# EAGLE board microSRCP-RaspiV2 (EAGLE 6.5.0)
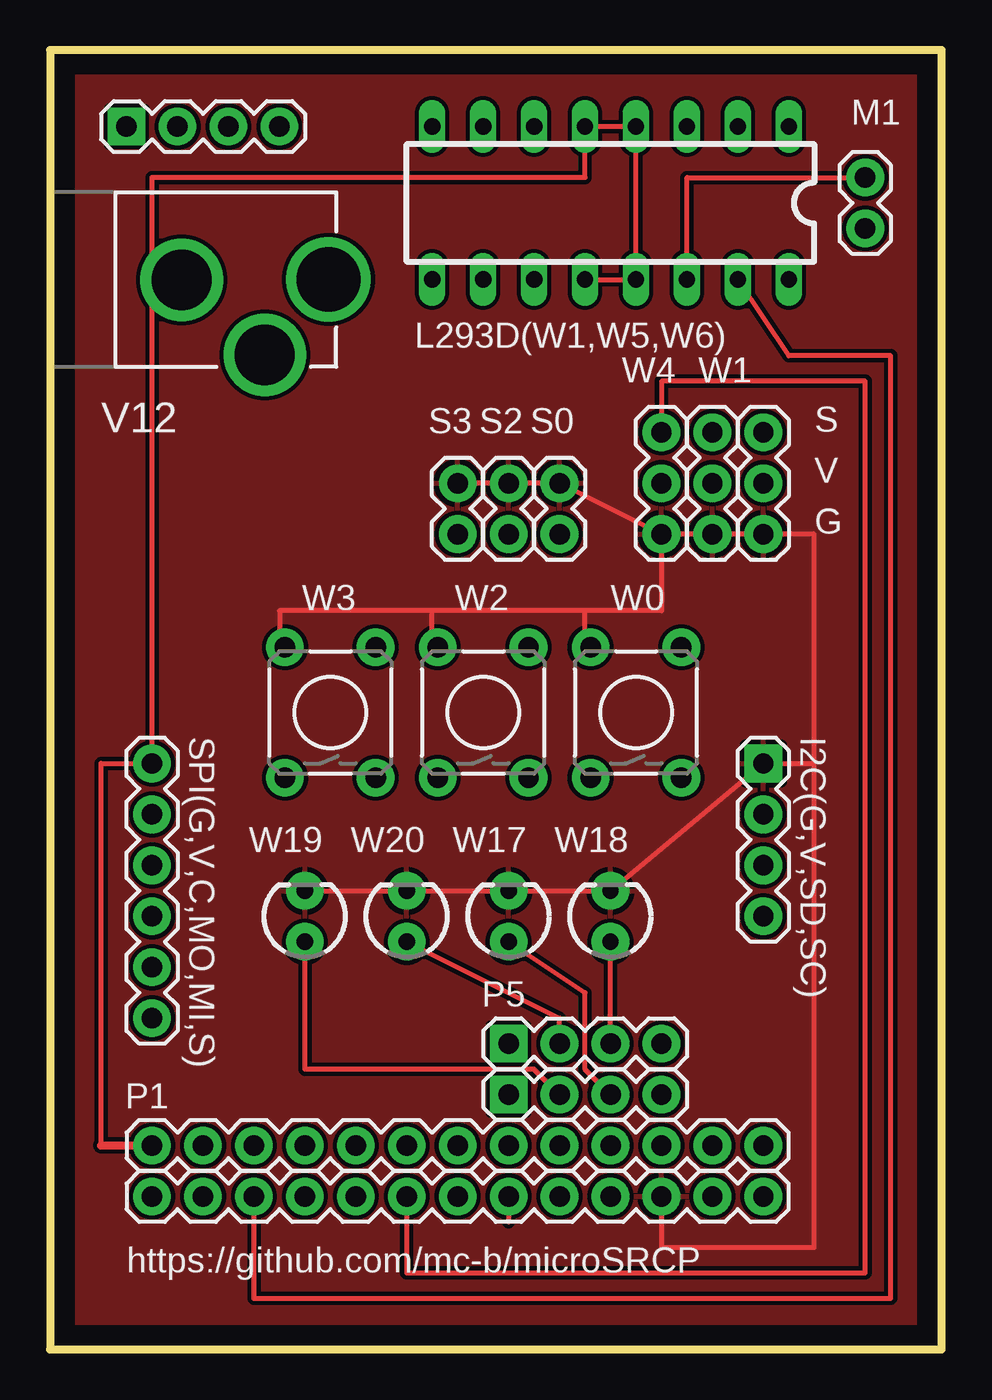
[diagram p0: board, top side]
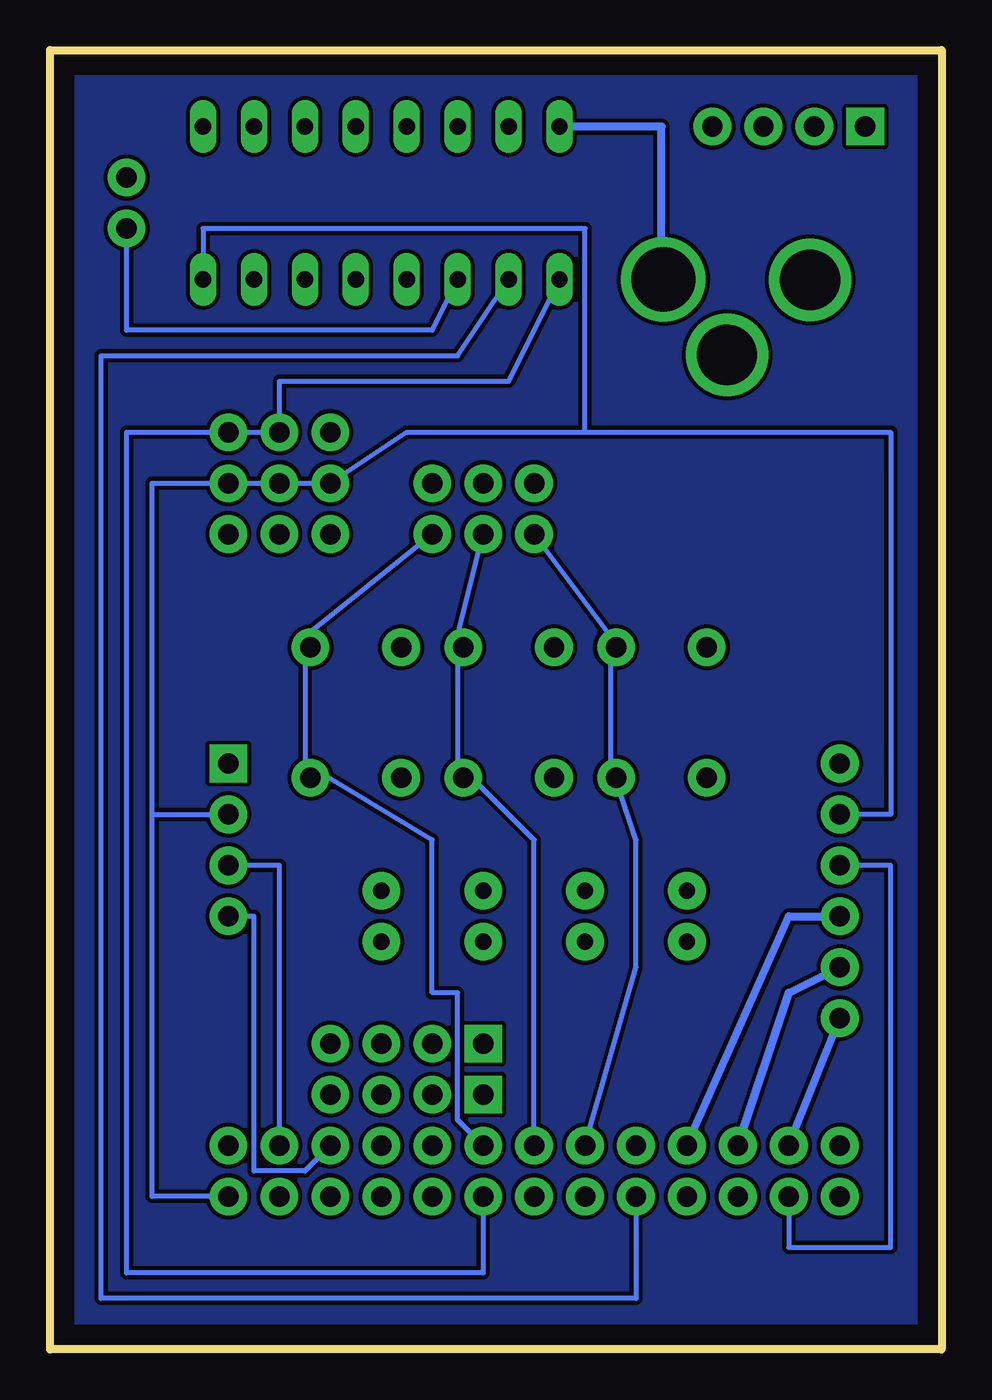
[diagram p1: board, bottom side, seen from below]

Size 44.45 x 64.77 mm. Coordinates in mm from the lower left corner, seen from the top.
Outline: 0,0 44.45,0 44.45,64.77 0,64.77 0,0
Copper layers (1*16): Top 0.035mm / dielectric 1.5mm / Bottom 0.035mm
Design rules "default": minimum track width 10mil, minimum drill 24mil, track to track 8mil, track to pad 8mil, pad to pad 8mil, via to via 8mil, smd to smd 8mil, copper to edge 40mil, drill to drill 8mil, minimum pad ring 10mil, minimum via ring 8mil, stop-mask expansion 4mil, vias tented up to drill 0mil, thermal gap 10mil

## Footprints (pad centres in the part's own frame; a part is rotated, then mirrored left to right if it is on the bottom)
1X13 = drill 1.016 pad 1.88: 1 0,0; 2 2.54,0; 3 5.08,0; 4 7.62,0; 5 10.16,0; 6 12.7,0; 7 15.24,0; 8 17.78,0; 9 20.32,0; 10 22.86,0; 11 25.4,0; 12 27.94,0; 13 30.48,0
1X04 = drill 1.016 pad 1.88 square: 1 0,0 | drill 1.016 pad 1.88: 2 2.54,0; 3 5.08,0; 4 7.62,0
DIL16 = drill 0.813 long: 1 -8.89,-3.81; 2 -6.35,-3.81; 3 -3.81,-3.81; 4 -1.27,-3.81; 5 1.27,-3.81; 6 3.81,-3.81; 7 6.35,-3.81; 8 8.89,-3.81; 9 8.89,3.81; 10 6.35,3.81; 11 3.81,3.81; 12 1.27,3.81; 13 -1.27,3.81; 14 -3.81,3.81; 15 -6.35,3.81; 16 -8.89,3.81
1X02 = drill 1.016 pad 1.88: 1 0,0; 2 2.54,0
1X06 = drill 1.016 pad 1.88: 1 0,0; 2 2.54,0; 3 5.08,0; 4 7.62,0; 5 10.16,0; 6 12.7,0
POWER_JACK_PTH_LOCK = drill 2.997 pad 4.115: GND 0.025,6.557; GNDBREAK 3.762,10.7 | drill 3.2 pad 4.115: PWR 0,13.878
TACTILE-PTH = drill 1.016 pad 1.88: 1 -3.251,2.261; 2 3.251,2.261; 3 -3.251,-2.261; 4 3.251,-2.261
1X03 = drill 1.016 pad 1.88: 1 0,0; 2 2.54,0; 3 5.08,0
LED3MM = drill 0.813 pad 1.88: A -1.27,0; K 1.27,0

## Placement (x,y rotation side)
E$1  [1X13]  5.08,7.62 0 top
E$2  [1X04]  3.81,60.96 0 top
E$3  [1X04]  22.86,12.7 0 top
I2C(G,V,SD,SC)  [1X04]  35.56,29.21 270 top
L293D(W1,W5,W6)  [DIL16]  27.94,57.15 180 top
M1  [1X02]  40.64,58.42 270 top
P1  [1X13]  5.08,10.16 0 top
P5  [1X04]  22.86,15.24 0 top
S0  [1X02]  25.4,40.64 90 top
S2  [1X02]  22.86,40.64 90 top
S3  [1X02]  20.32,40.64 90 top
SPI(G,V,C,MO,MI,S)  [1X06]  5.08,29.21 270 top
V12  [POWER_JACK_PTH_LOCK]  0,53.34 270 top
W0  [TACTILE-PTH]  29.21,31.75 90 top
W1  [1X03]  33.02,40.64 90 top
W1N  [1X03]  35.56,40.64 90 top
W2  [TACTILE-PTH]  21.59,31.75 90 top
W3  [TACTILE-PTH]  13.97,31.75 90 top
W4  [1X03]  30.48,40.64 90 top
W17  [LED3MM]  22.86,21.59 90 top
W18  [LED3MM]  27.94,21.59 90 top
W19  [LED3MM]  12.7,21.59 90 top
W20  [LED3MM]  17.78,21.59 90 top

## Library data of the parts
E$1-E$3 I2C(G,V,SD,SC) P1 P5 V12 = SparkFun-Connectors
L293D(W1,W5,W6) = SparkFun-DigitalIC
M1 S0 S2 S3 W1 W4 = SparkFun-Capacitors
SPI(G,V,C,MO,MI,S) = SparkFun-Boards
W0 W2 W3 = SparkFun-Electromechanical
W1N = SparkFun-Sensors
W17-W20 = SparkFun-LED

## Nets
5V: E$1.13 I2C(G,V,SD,SC).2 L293D(W1,W5,W6).16 SPI(G,V,C,MO,MI,S).2 W1.2 W1N.2 W4.2
GND: E$1.11 I2C(G,V,SD,SC).1 S0.2 S2.2 S3.2 W1.1 W1N.1 W4.1 W17.K W18.K W19.K W20.K
GND2: L293D(W1,W5,W6).4 L293D(W1,W5,W6).5 L293D(W1,W5,W6).12 L293D(W1,W5,W6).13 P1.1 SPI(G,V,C,MO,MI,S).1
S0: P1.8 S0.1
S1: E$1.8 L293D(W1,W5,W6).9 W1.3 W1N.3
S2: P1.7 S2.1
S3: P1.6 S3.1
S4: E$1.6 W4.3
S5: E$1.5 L293D(W1,W5,W6).10
S6: E$1.3 L293D(W1,W5,W6).15
S17: P5.3 W18.A
S18: E$3.3 W17.A
S19: P5.2 W20.A
S20: E$3.2 W19.A
S$22: L293D(W1,W5,W6).8
SCE0: E$1.2 SPI(G,V,C,MO,MI,S).3
SM1L: L293D(W1,W5,W6).14 M1.1
SM1R: L293D(W1,W5,W6).11 M1.2
SMISO: P1.3 SPI(G,V,C,MO,MI,S).5
SMOSI: P1.4 SPI(G,V,C,MO,MI,S).4
SSCL: I2C(G,V,SD,SC).4 P1.11
SSCLK: P1.2 SPI(G,V,C,MO,MI,S).6
SSDA: I2C(G,V,SD,SC).3 P1.12

## Tracks (layer width: path | path; a pad name or v marks a point on that pad's centre or on a via)
5V
  Bottom 0.254: E$1.13 39.37,7.62 39.37,26.67 | 39.37,26.67 I2C(G,V,SD,SC).2 | 39.37,26.67 39.37,43.18 W1N.2 W1.2 W4.2 26.67,45.72 17.78,45.72 | 17.78,45.72 2.54,45.72 2.54,26.67 SPI(G,V,C,MO,MI,S).2 | 17.78,45.72 17.78,55.88 36.83,55.88 L293D(W1,W5,W6).16
GND
  Top 0.254: E$1.11 30.48,5.08 38.1,5.08 38.1,29.21 | 38.1,29.21 38.1,40.64 W1N.1 W1.1 W4.1 | S3.2 S2.2 S0.2 W4.1 | W4.1 30.48,36.83 26.67,36.83 | 26.67,35.56 26.67,36.83 | 26.67,36.83 19.05,36.83 | 19.05,35.56 19.05,36.83 | 19.05,36.83 11.43,36.83 11.43,35.56 | 38.1,29.21 I2C(G,V,SD,SC).1 W18.K W17.K W20.K W19.K
  pour Top: 0,0 44.45,0 44.45,64.77 0,64.77
GND2
  Top 0.254: 2.54,10.16 2.54,29.21 SPI(G,V,C,MO,MI,S).1 5.08,58.42 26.67,58.42 L293D(W1,W5,W6).5 L293D(W1,W5,W6).4 L293D(W1,W5,W6).13 L293D(W1,W5,W6).12
  Top 0.406: 2.54,10.16 P1.1
S0
  Bottom 0.254: P1.8 24.13,11.43 24.13,17.78 25.4,17.78 25.4,25.4 31.75,29.21 31.75,35.56 S0.1
S1
  Top 0.254: E$1.8 22.86,6.35
  Bottom 0.254: E$1.8 22.86,3.81 40.64,3.81 40.64,45.72 W1N.3 W1.3 33.02,48.26 21.59,48.26 L293D(W1,W5,W6).9
S2
  Bottom 0.254: P1.7 20.32,25.4 24.13,29.21 24.13,35.56 S2.1
S3
  Bottom 0.254: P1.6 15.24,19.05 15.24,25.4 16.51,29.21 16.51,35.56 S3.1
S4
  Top 0.254: E$1.6 17.78,3.81 40.64,3.81 40.64,48.26 30.48,48.26 W4.3
S5
  Bottom 0.254: E$1.5 15.24,2.54 41.91,2.54 41.91,49.53 24.13,49.53 L293D(W1,W5,W6).10
S6
  Top 0.254: L293D(W1,W5,W6).15 36.83,49.53 41.91,49.53 41.91,2.54 10.16,2.54 E$1.3
S17
  Top 0.254: P5.3 W18.A
S18
  Top 0.254: E$3.3 26.67,13.97 26.67,17.78 W17.A
S19
  Top 0.254: P5.2 25.4,16.51 W20.A
S20
  Top 0.254: E$3.2 24.13,13.97 12.7,13.97 W19.A
S$1
  pour Bottom: 0,64.77 0,0 44.45,0 44.45,64.77
S$22
  Bottom 0.406: 13.97,54.61 13.97,60.96 L293D(W1,W5,W6).8
SCE0
  Bottom 0.254: E$1.2 7.62,5.08 2.54,5.08 2.54,24.13 SPI(G,V,C,MO,MI,S).3
SM1L
  Top 0.254: L293D(W1,W5,W6).14 31.75,58.42 M1.1
SM1R
  Bottom 0.254: L293D(W1,W5,W6).11 25.4,50.8 40.64,50.8 M1.2
SMISO
  Bottom 0.406: P1.3 7.62,17.78 SPI(G,V,C,MO,MI,S).5
SMOSI
  Bottom 0.406: P1.4 7.62,21.59 SPI(G,V,C,MO,MI,S).4
SSCL
  Bottom 0.254: P1.11 31.75,8.89 34.29,8.89 34.29,21.59 I2C(G,V,SD,SC).4
SSCLK
  Bottom 0.406: P1.2 SPI(G,V,C,MO,MI,S).6
SSDA
  Bottom 0.254: P1.12 33.02,24.13 I2C(G,V,SD,SC).3

## Text on the board
tNames: S | V | G | https://github.com/mc-b/microSRCP